# Altium PCB S bus (5.775 X 3.30 inches).PCBDOC
Units mm, origin at the board's own origin, x right, y up, seen from the top; angles counter-clockwise.
Board outline 146.69 x 83.82 mm, 10 copper layers (TopLayer, MidLayer1, MidLayer2, MidLayer3, MidLayer4, MidLayer5, MidLayer6, MidLayer7, MidLayer8, BottomLayer); 5 components, 15 nets, 109 pads, 0 vias.
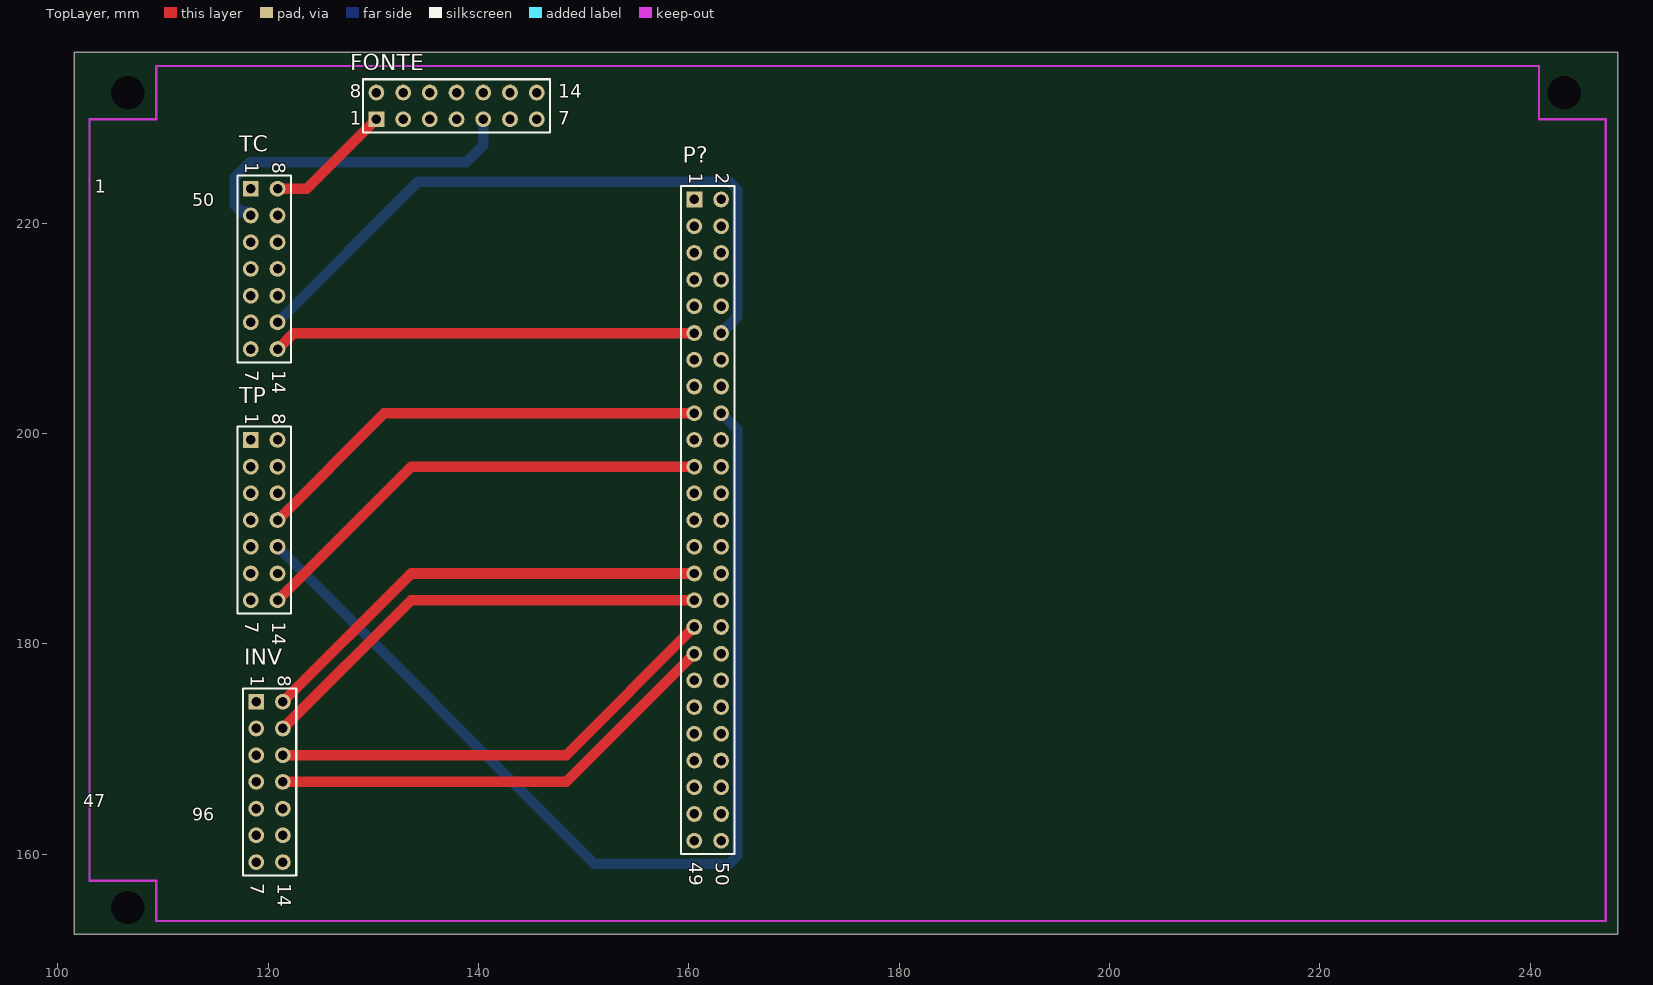
[diagram p0: TopLayer view]
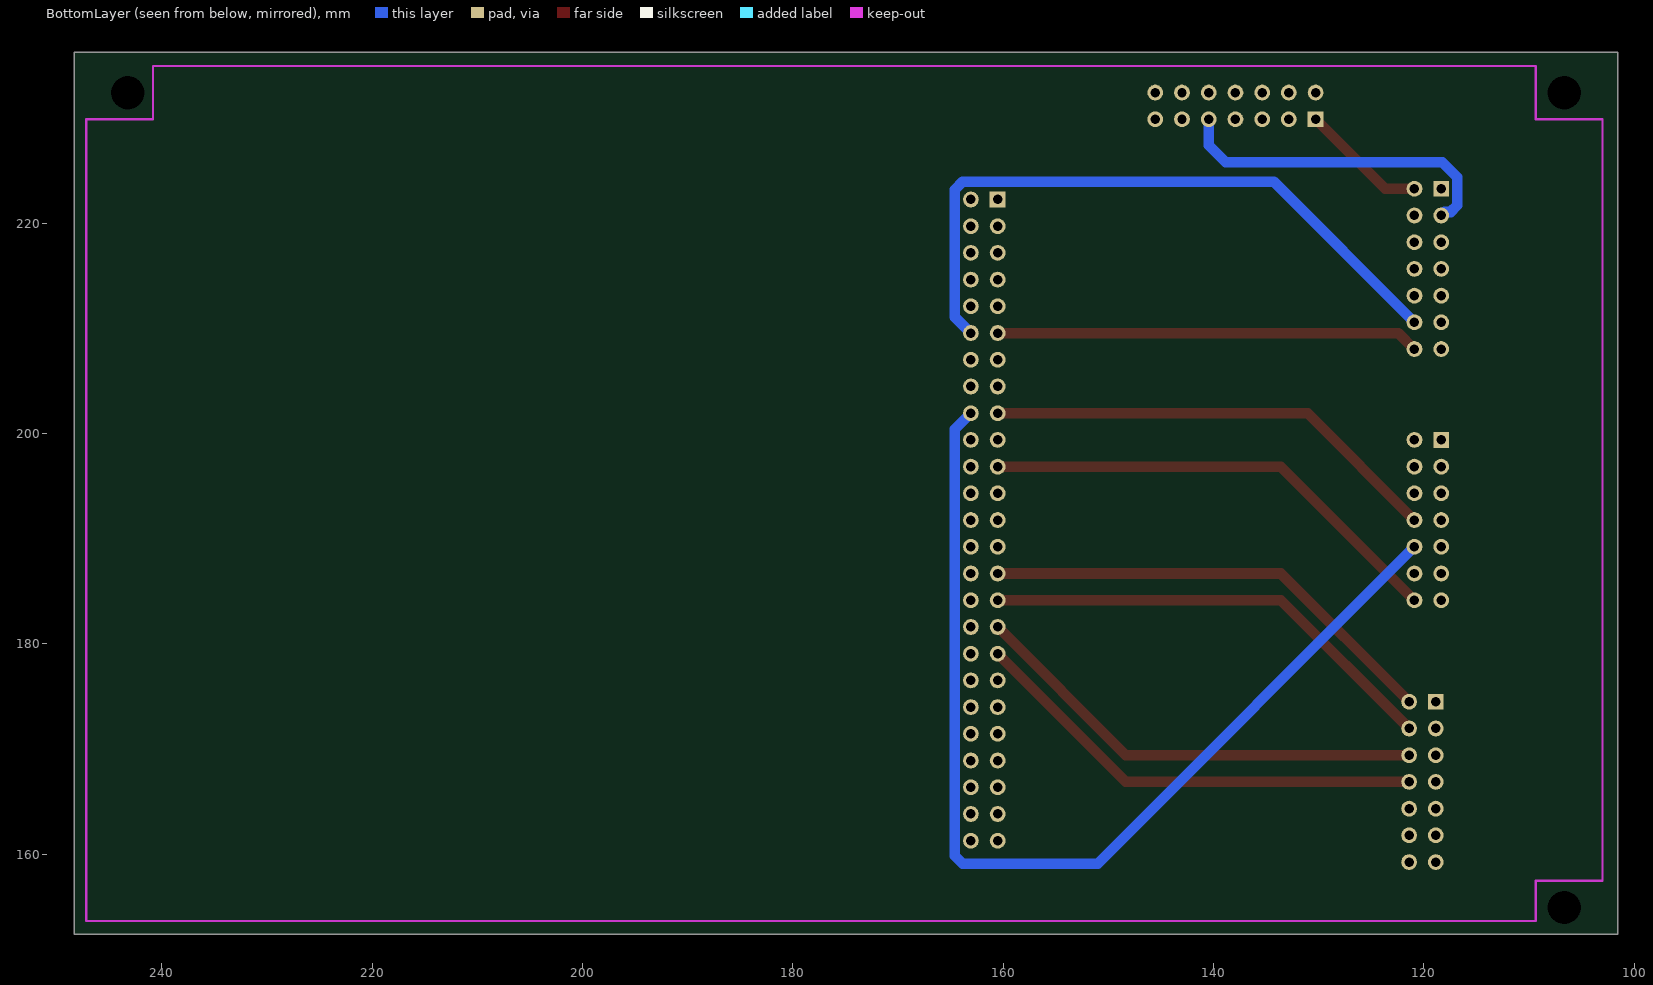
[diagram p1: BottomLayer view, seen from below]
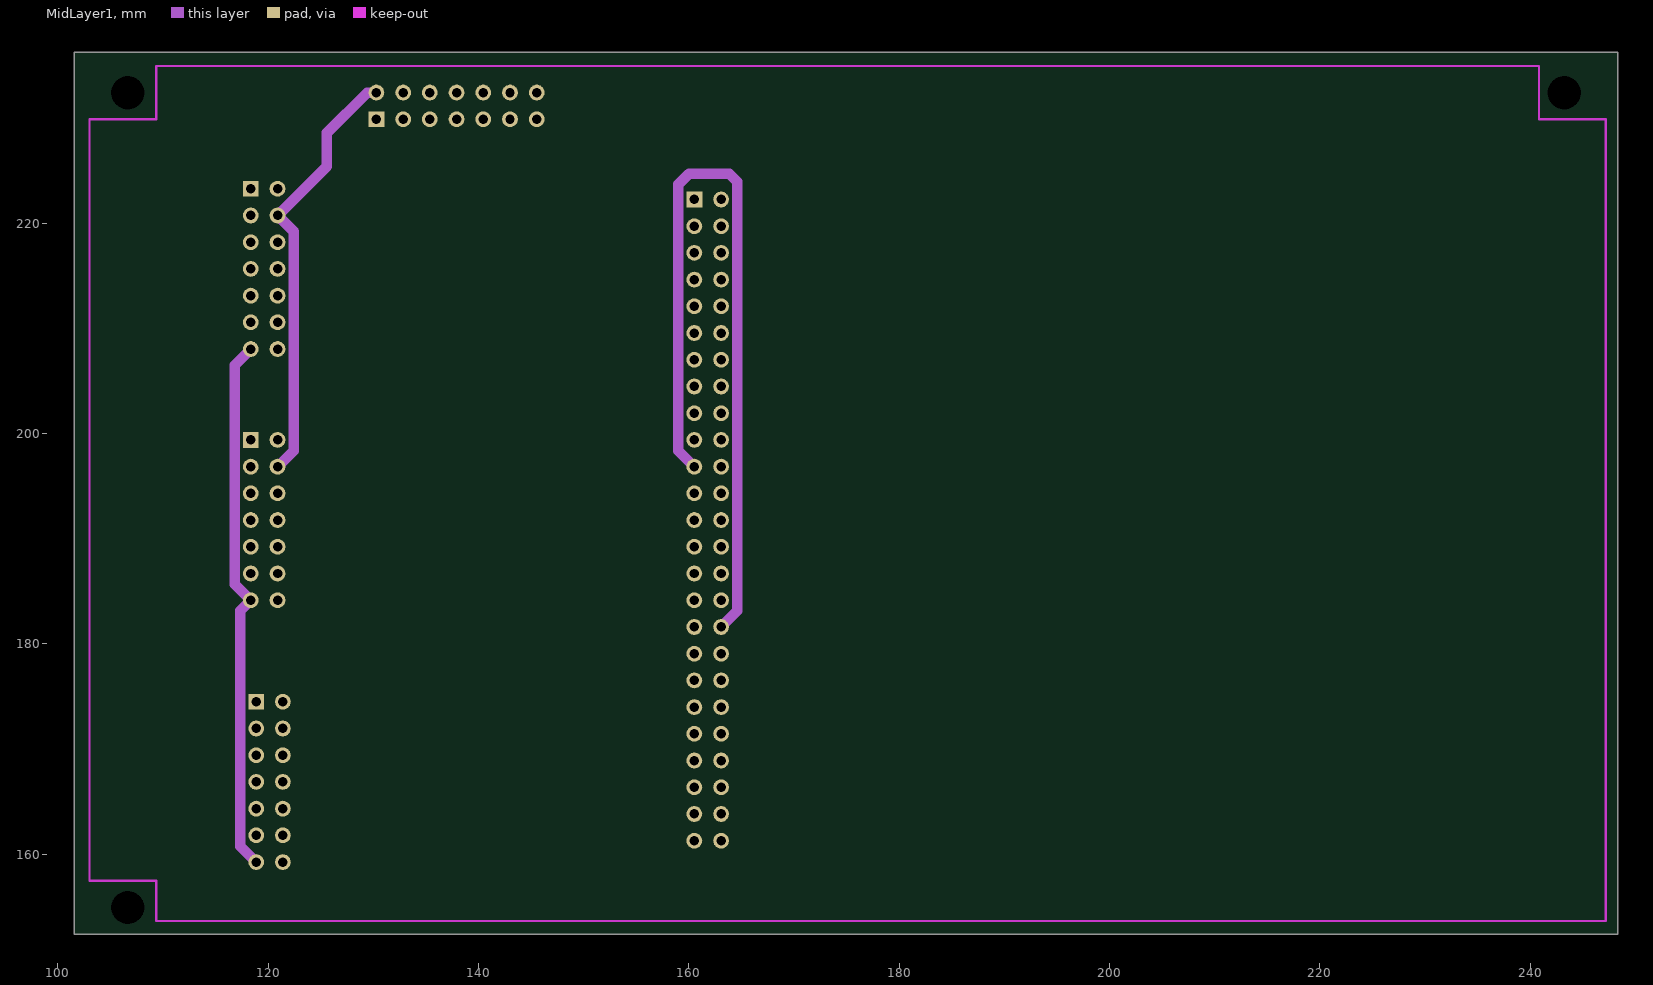
[diagram p2: MidLayer1]
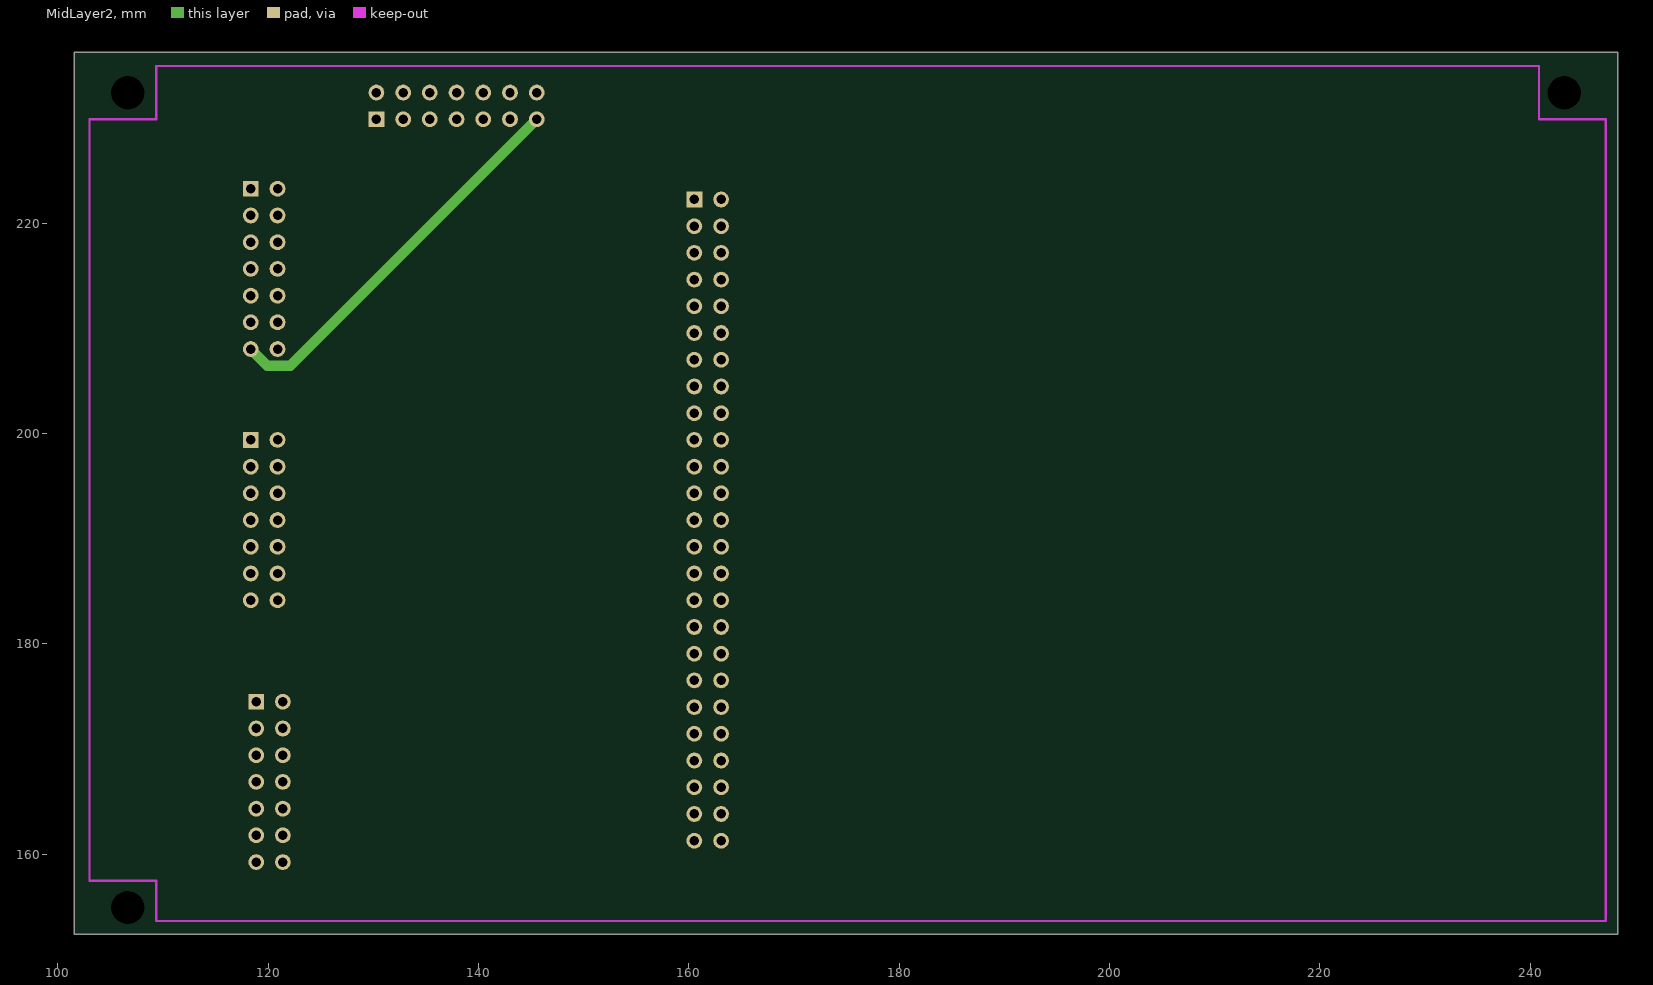
[diagram p3: MidLayer2]
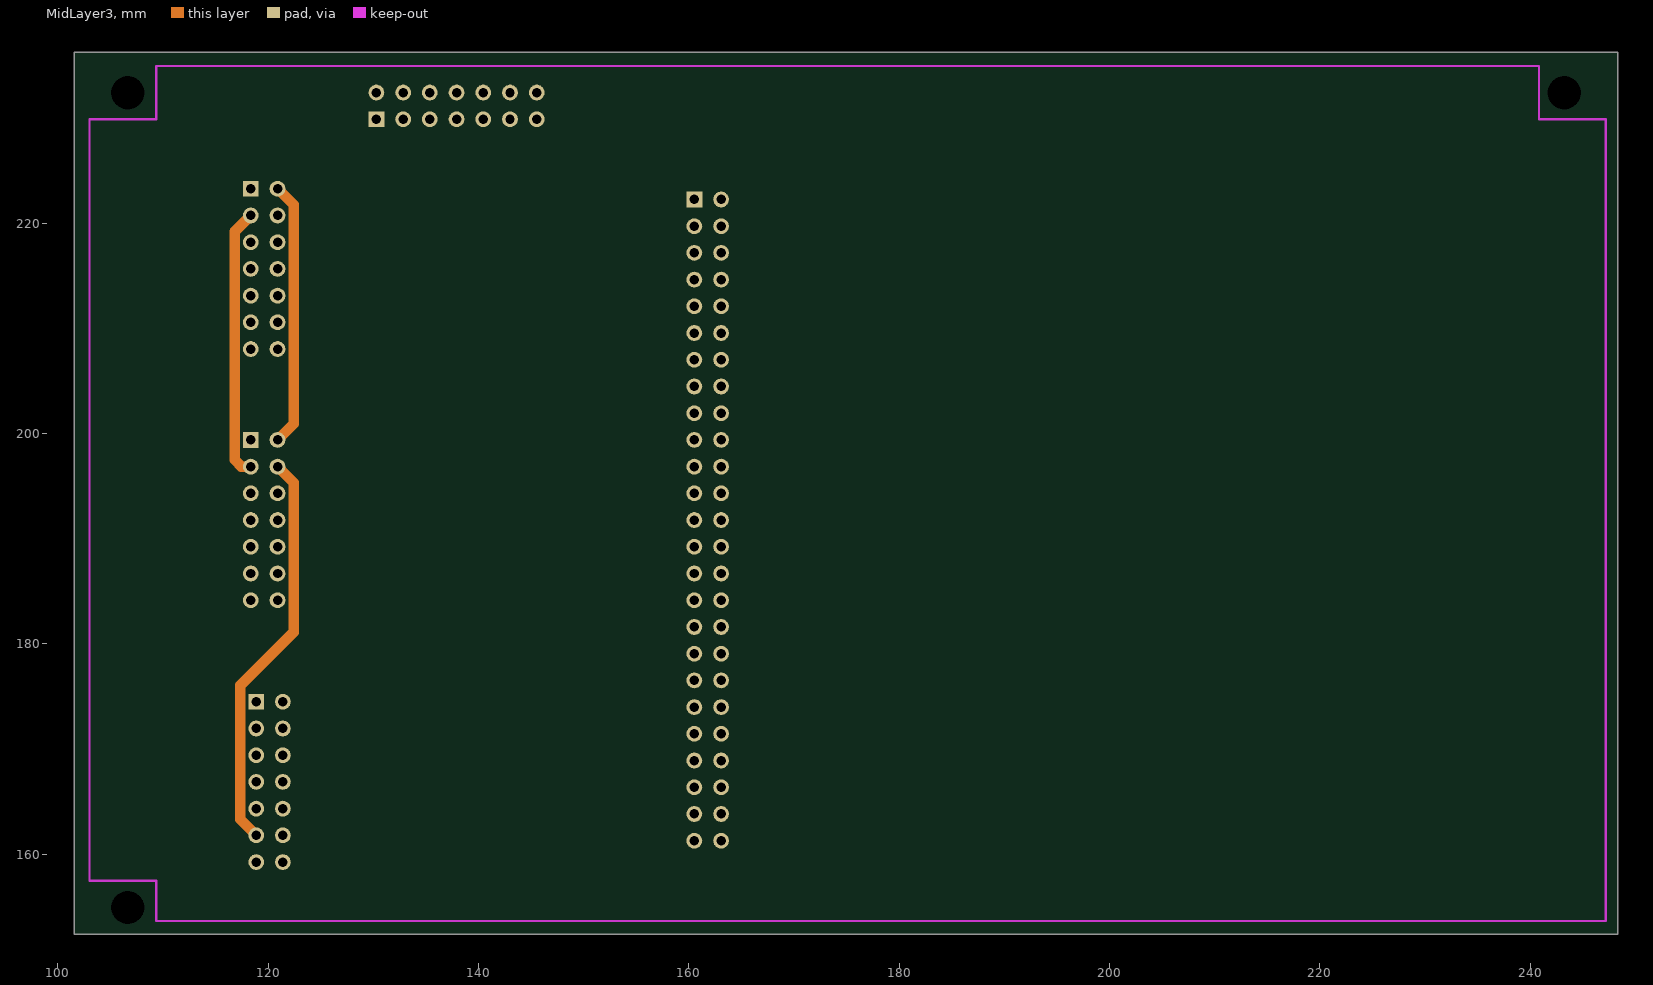
[diagram p4: MidLayer3]
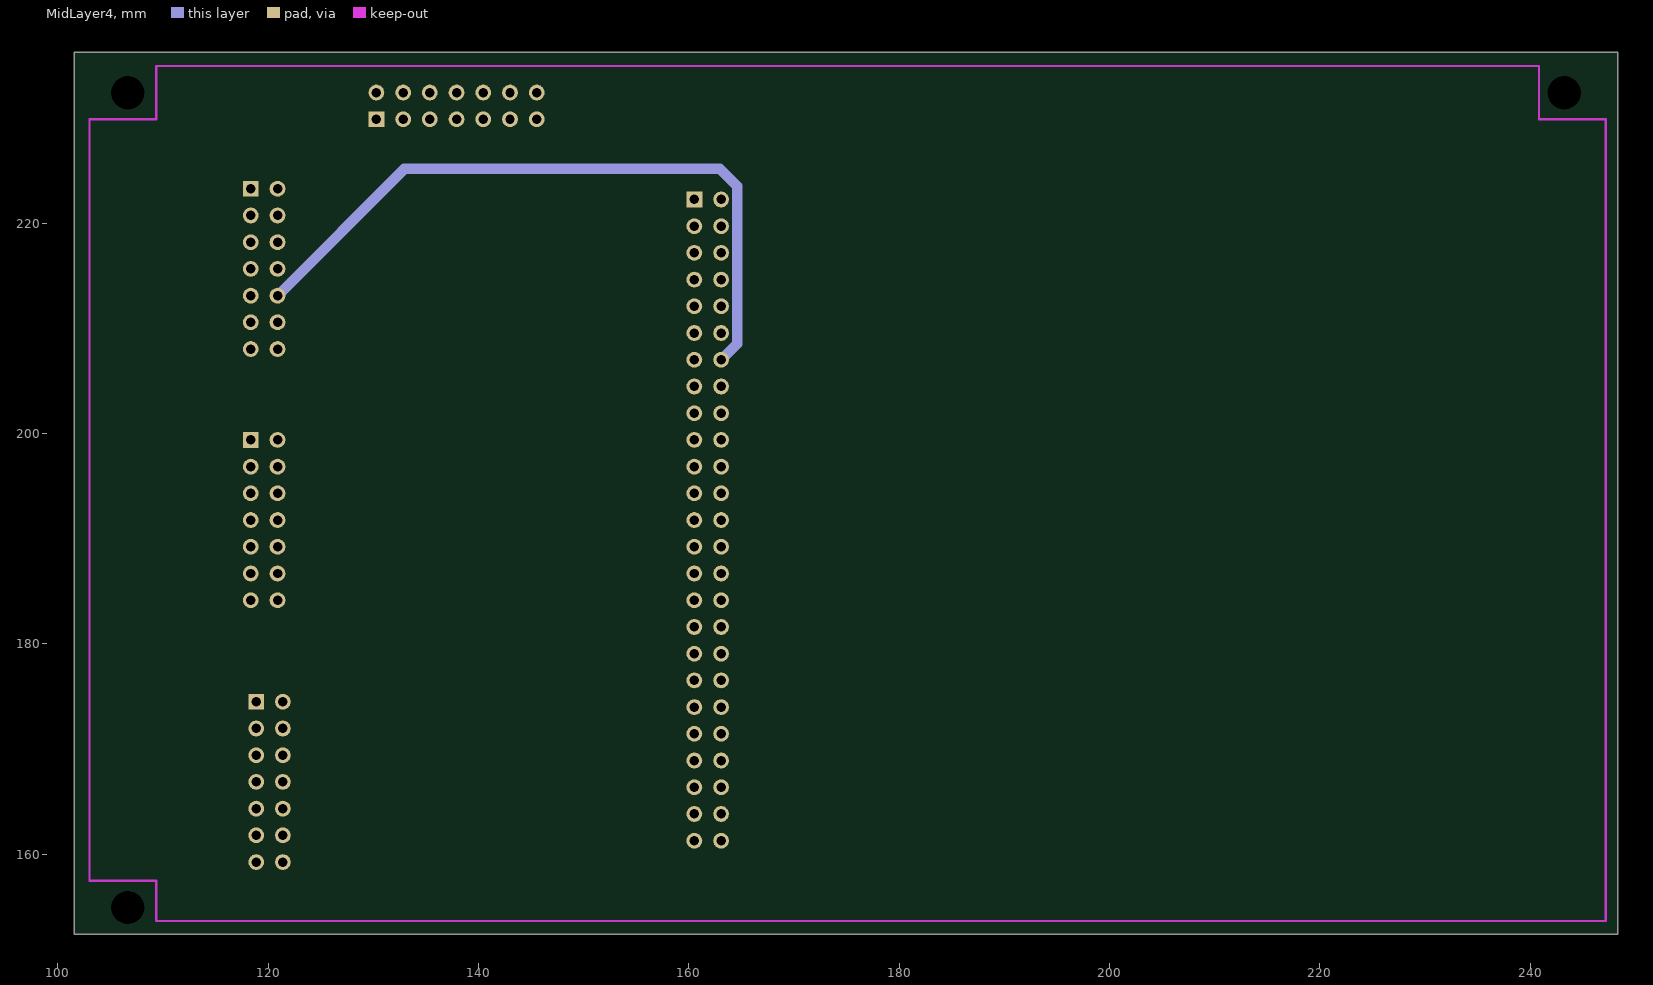
[diagram p5: MidLayer4]
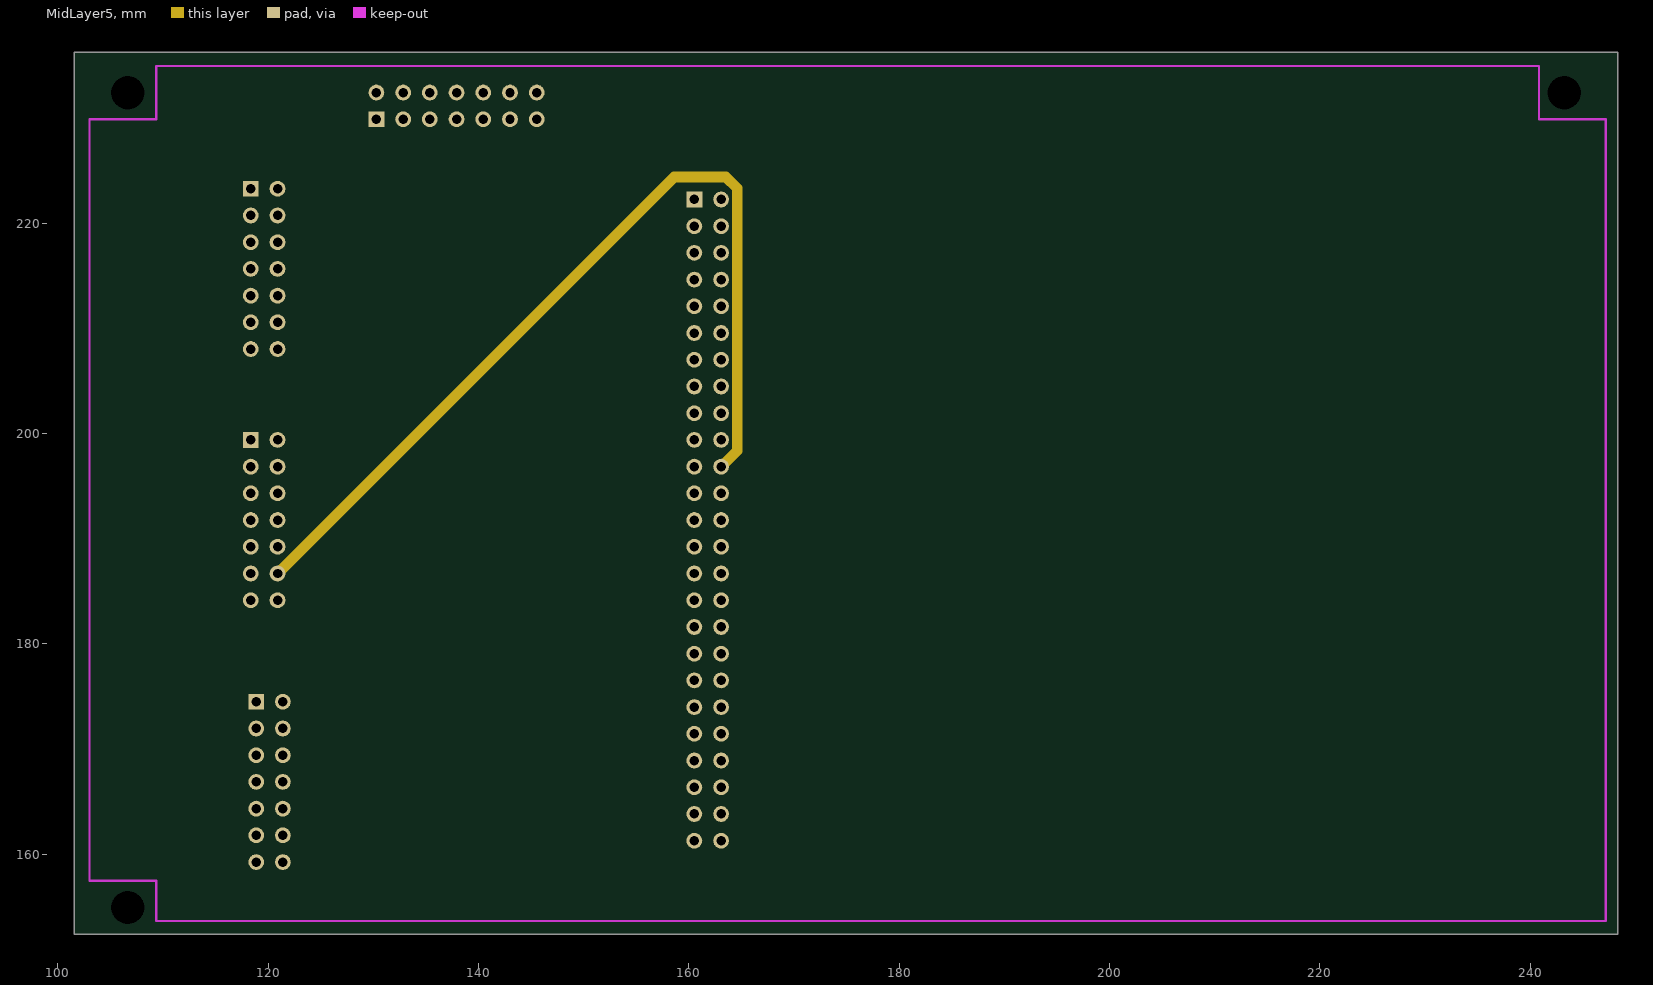
[diagram p6: MidLayer5]
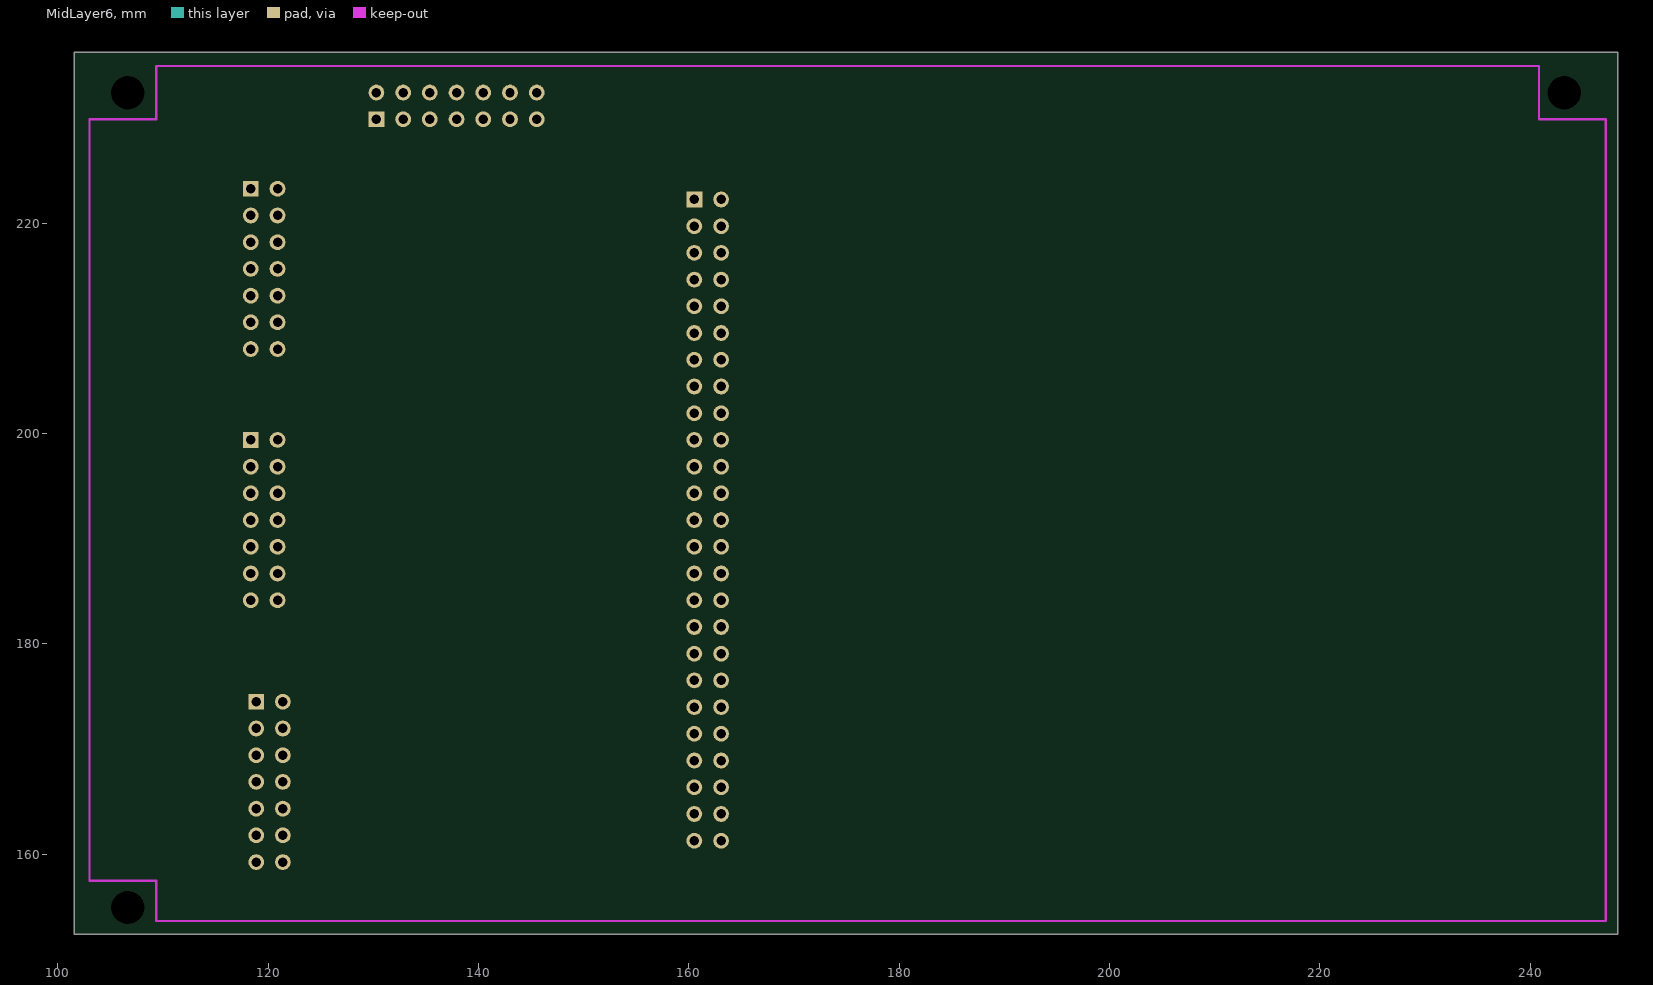
[diagram p7: MidLayer6]
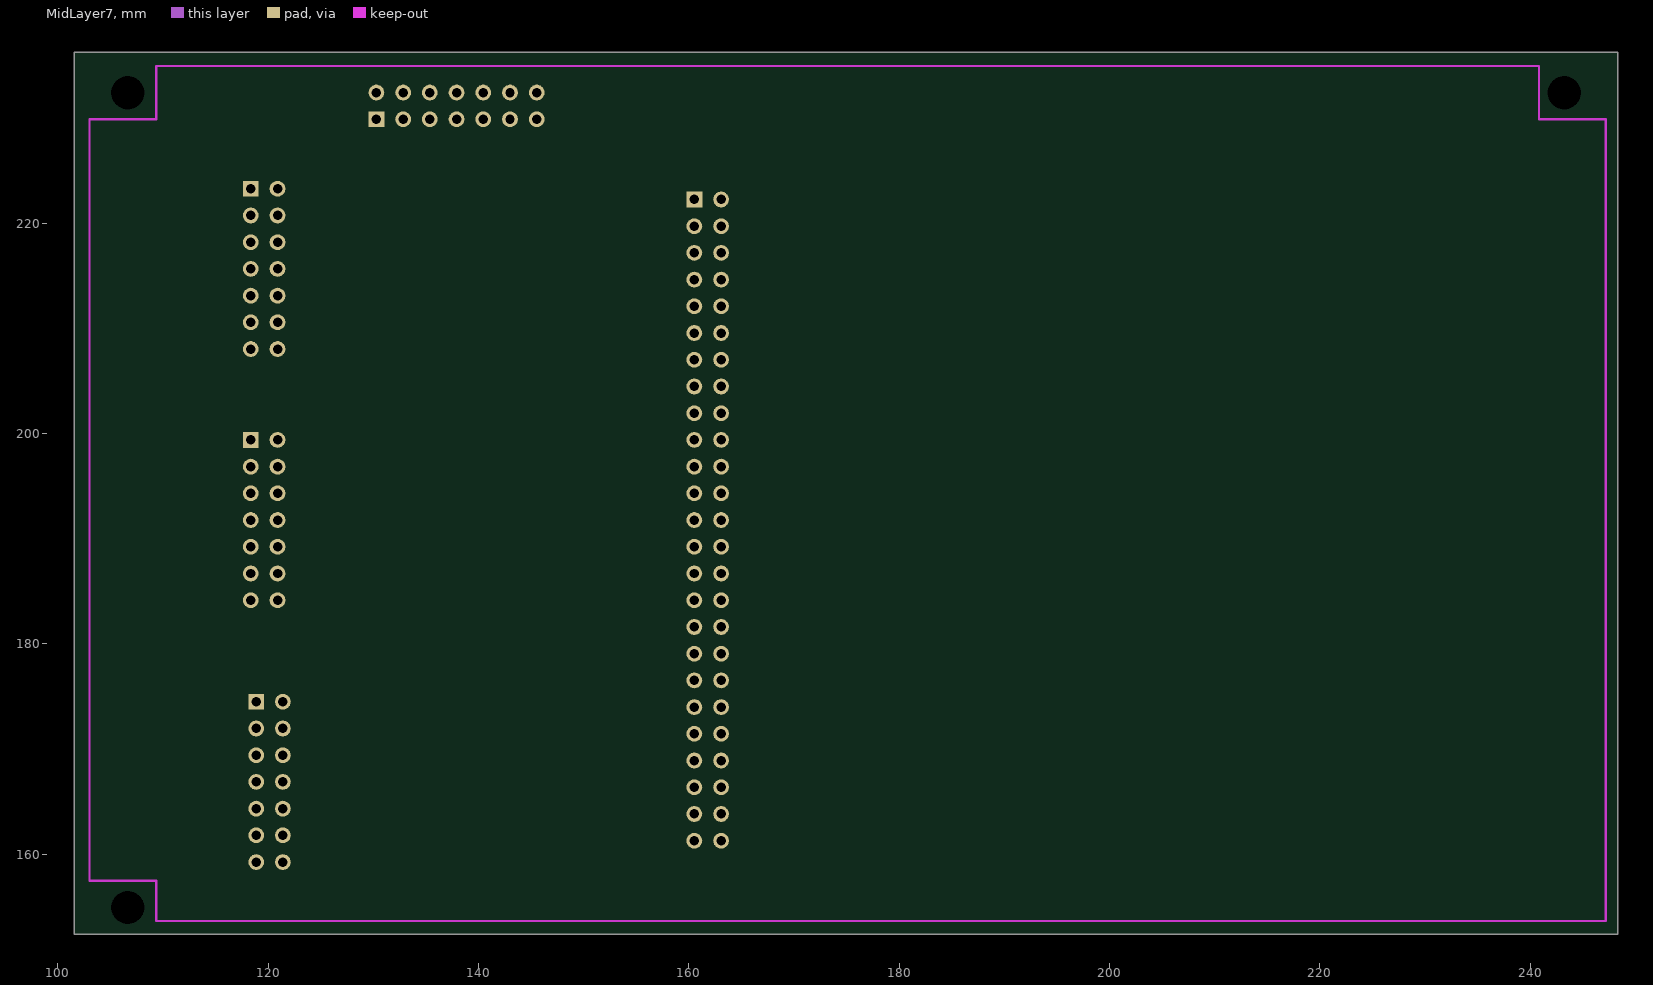
[diagram p8: MidLayer7]
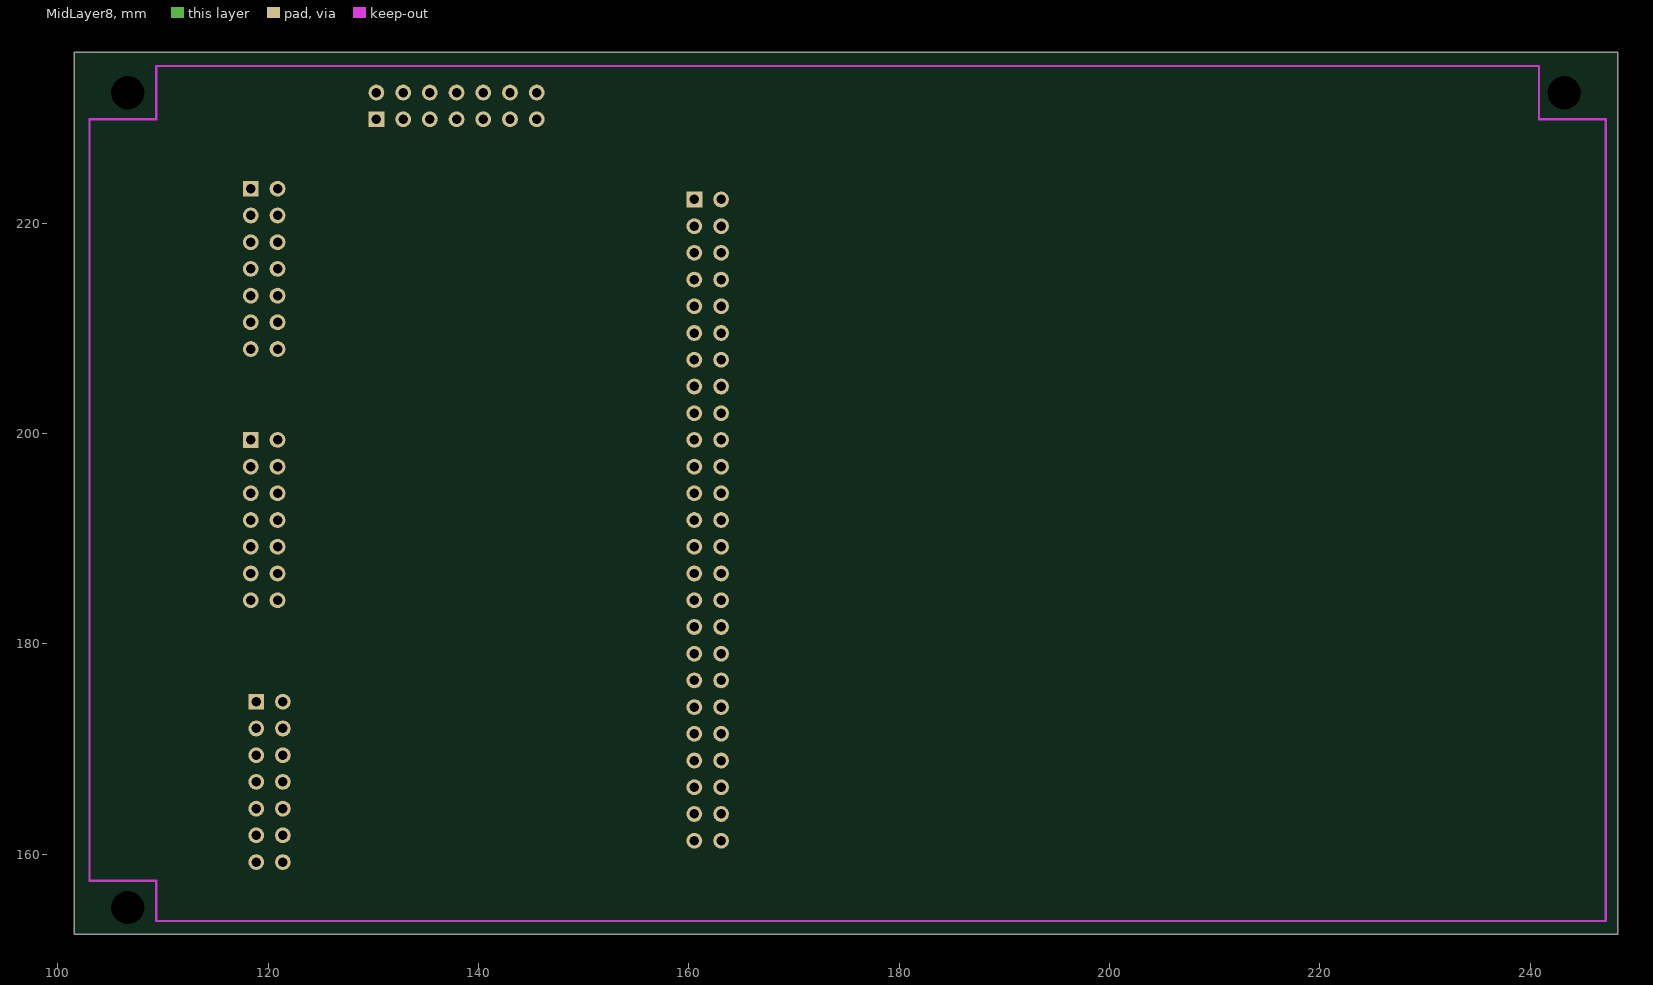
[diagram p9: MidLayer8]

## Layer stack, top to bottom
TopSolder: solder mask 0.0102, Solder Resist, Dk 3.5
TopLayer: signal copper 0.0356
Dielectric1: core 0.32, FR-4, Dk 4.8
MidLayer1: signal copper 0.0356
Dielectric2: prepreg 0.32, FR-4, Dk 4.8
MidLayer2: signal copper 0.0356
Dielectric3: core 0.32, FR-4, Dk 4.8
MidLayer3: signal copper 0.0356
Dielectric4: prepreg 0.32, FR-4, Dk 4.8
MidLayer4: signal copper 0.0356
Dielectric5: core 0.32, FR-4, Dk 4.8
MidLayer5: signal copper 0.0356
Dielectric6: prepreg 0.32, FR-4, Dk 4.8
MidLayer6: signal copper 0.0356
Dielectric7: core 0.32, FR-4, Dk 4.8
MidLayer7: signal copper 0.0356
Dielectric8: prepreg 0.32, FR-4, Dk 4.8
MidLayer8: signal copper 0.0356
Dielectric9: core 0.32, FR-4, Dk 4.8
BottomLayer: signal copper 0.0356
BottomSolder: solder mask 0.0102, Solder Resist, Dk 3.5

## Board outline
101.6,152.4 248.285,152.4 248.285,236.22 101.6,236.22

## Design rules (kind name [scope] priority, off if disabled: settings)
Clearance [All] p1: gap=0.254 ignorepadtopadclearanceinfootprint=FALSE except(0: Arc-Hole Track-Hole SMDPad-Hole THPad-Hole Via-Hole Fill-Hole Poly-Hole Region-Hole Text-Hole)
FabricationTestPointUsage TestPointUsage [All] p1: valid=0 allowmultiple=FALSE
FabricationTestpoint Testpoint [All] p1: side=3 testpointundercomponent=TRUE minsize=1.016 maxsize=2.54 preferedsize=1.524 minholesize=0.508 maxholesize=1.016 preferedholesize=0.813 testpointgrid=0.025 allowsidetop=TRUE allowsidebottom=TRUE usegrid=TRUE gridtolerance=0
PlaneClearance [All] p1: clearance=0.254
PolygonConnect [All] p1: connectstyle=Relief reliefconductorwidth=0.254 reliefentries=4 polygonreliefangle="90 Angle" airgapwidth=0.254
RoomDefinition "S bus (5.775 X 3.30 inches)" [InComponentClass('S bus (5.775 X 3.30 inches)')] p1: confinementstyle=ConfineIn formatcopy=TRUE lockcomponents=FALSE outline 249.428,153.924 277.368,153.924 277.368,179.07 249.428,179.07
RoutingVias [All] p1: holewidth=0.711 width=1.27 viastyle="Through Hole" minholewidth=0.711 minwidth=1.27 maxholewidth=0.711 maxwidth=1.27
SilkToSolderMaskClearance SilkscreenOverComponentPads [IsPad] p1: minsilkscreentomaskgap=0.254 clearancetoexposedcopper=TRUE
SolderMaskExpansion [All] p1: expansion=0.051
Width [All] p1: maxlimit=2 minlimit=0.75 preferedwidth=1
26 further rules are at their usual default settings.

## Components (designator, comment, footprint, x,y, rotation, side; value= is the part's Value field where it differs from the comment)
FONTE "Header 7X2A" HDR2X7_CEN 130.302,229.87 r0 top
INV "Header 7X2A" HDR2X7_CEN 118.872,174.498 r270 top
P? "Header 25X2" HDR2X25 160.528,222.25 r270 top
TC "Header 7X2A" HDR2X7_CEN 118.364,223.266 r270 top
TP "Header 7X2A" HDR2X7_CEN 118.364,199.39 r270 top

## Footprints (in the part's own frame and the unit in brackets; to place one, negate y for a bottom-side part, rotate by r counter-clockwise, add the part's x,y. Pads: shape width x height; smd on the part's side, far side on the other; paste and mask are expansions set on the pad)
HDR2X7_CEN [mm] "Connector; Header; 7x2 Position"
  rect 1.5x1.5 hole 0.9: 1(0,0)
  round 1.5 hole 0.9: 2(2.54,0) 3(5.08,0) 4(7.62,0) 5(10.16,0) 6(12.7,0) 7(15.24,0) 8(0,2.54) 9(2.54,2.54) 10(5.08,2.54) 11(7.62,2.54) 12(10.16,2.54) 13(12.7,2.54) 14(15.24,2.54)
  silkscreen extent -1.27,-1.27 16.51,3.81
HDR2X25 [mm] "Connector; Header; 25x2 Position"
  rect 1.5x1.5 hole 0.9: 1(0,0)
  round 1.5 hole 0.9: 2(0,2.54) 3(2.54,0) 4(2.54,2.54) 5(5.08,0) 6(5.08,2.54) 7(7.62,0) 8(7.62,2.54) 9(10.16,0) 10(10.16,2.54) 11(12.7,0) 12(12.7,2.54) 13(15.24,0) 14(15.24,2.54) 15(17.78,0) 16(17.78,2.54) 17(20.32,0) 18(20.32,2.54) 19(22.86,0) 20(22.86,2.54) 21(25.4,0) 22(25.4,2.54) 23(27.94,0) 24(27.94,2.54) 25(30.48,0) 26(30.48,2.54) 27(33.02,0) 28(33.02,2.54) 29(35.56,0) 30(35.56,2.54) 31(38.1,0) 32(38.1,2.54) 33(40.64,0) 34(40.64,2.54) 35(43.18,0) 36(43.18,2.54) 37(45.72,0) 38(45.72,2.54) 39(48.26,0) 40(48.26,2.54) 41(50.8,0) 42(50.8,2.54) 43(53.34,0) 44(53.34,2.54) 45(55.88,0) 46(55.88,2.54) 47(58.42,0) 48(58.42,2.54) 49(60.96,0) 50(60.96,2.54)
  silkscreen extent -1.27,-1.27 62.23,3.81

## Part data
FONTE INV TC TP: "Header, 7-Pin, Dual row", LatestRevisionDate=17-Jul-2002, LatestRevisionNote="Re-released for DXP Platform.", Publisher="Altium Limited"
P?: "Header, 25-Pin, Dual row", LatestRevisionDate=17-Jul-2002, LatestRevisionNote="Re-released for DXP Platform.", Publisher="Altium Limited"

## Free pads (board coordinates)
  round 1.27 hole 3.175: 1(243.205,232.41) 2(106.68,232.41) 3(106.68,154.94)

## Nets (pads, with @x,y where several pads share a name; then routed paths per layer and width w, separated by ;. In a path a pad name is that pad's centre, name@x,y a point inside that pad or via, vN(x,y) a via of type N, cw(c..) or ccw(c..) an arc to the next point about the centre after c; other vN are vias at no path point)
NetFONTE_1: FONTE.1 TC.8 TP.8 | length 37.3
  TopLayer w1: TC.8 123.698,223.266 FONTE.1
  MidLayer3 w1: TP.8 122.428,200.914 122.428,221.742 TC.8
NetFONTE_5: FONTE.5 TC.2 TP.2 | length 57.6
  MidLayer3 w1: TP.2 117.475,196.85 116.84,197.485 116.84,219.202 TC.2
  BottomLayer w1: TC.2 118.034,221.056 117.475,221.056 116.84,221.691 116.84,224.358 118.262,225.781 138.836,225.781 140.462,227.406 FONTE.5
NetFONTE_7: FONTE.7 INV.7 TC.7 TP.7 | length 88.6
  MidLayer1 w1: TC.7 116.84,206.502 116.84,185.674 TP.7 117.348,183.134 117.348,160.782 INV.7
  MidLayer2 w1: TC.7 119.939,206.451 122.123,206.451 FONTE.7
NetFONTE_8: FONTE.8 INV.6 TC.9 TP.9 | length 79.7
  MidLayer1 w1: TP.9 122.428,198.374 122.428,219.202 TC.9 125.603,225.425 125.603,228.6 129.413,232.41 FONTE.8
  MidLayer3 w1: INV.6 117.348,163.322 117.348,176.047 122.428,181.127 122.428,195.326 TP.9
NetINV_8: INV.8 P?.29 | length 44.2
  TopLayer w1: INV.8 133.604,186.69 P?.29
NetINV_9: INV.9 P?.31 | length 44.2
  TopLayer w1: INV.9 133.604,184.15 P?.31
NetINV_10: INV.10 P?.33 | length 44.2
  TopLayer w1: INV.10 148.336,169.418 P?.33
NetINV_11: INV.11 P?.35 | length 44.2
  TopLayer w1: INV.11 148.336,166.878 P?.35
NetP?_11: P?.11 TC.14 | length 40.3
  TopLayer w1: TC.14 122.428,209.55 P?.11
NetP?_12: P?.12 TC.13 | length 63.8
  BottomLayer w1: TC.13 134.29,223.952 163.83,223.952 164.592,223.19 164.592,211.074 P?.12
NetP?_14: P?.14 TC.12 | length 66.5
  MidLayer4 w1: TC.12 132.969,225.171 162.941,225.171 164.592,223.52 164.592,208.534 P?.14
NetP?_17: P?.17 TP.11 | length 43.8
  TopLayer w1: TP.11 131.064,201.93 P?.17
NetP?_18: P?.18 TP.12 | length 99.2
  BottomLayer w1: TP.12 151.028,159.106 163.83,159.106 164.592,159.868 164.592,200.406 P?.18
NetP?_21: P?.21 P?.34 TP.14 | length 121.6
  TopLayer w1: TP.14 133.604,196.85 P?.21
  MidLayer1 w1: P?.21 159.004,198.374 159.004,223.672 160.02,224.688 163.83,224.688 164.592,223.926 164.592,183.134 P?.34
NetP?_22: P?.22 TP.13 | length 86.8
  MidLayer5 w1: TP.13 158.598,224.384 163.525,224.384 164.592,223.317 164.592,198.374 P?.22
pads on no net: FONTE.2 FONTE.3 FONTE.4 FONTE.6 FONTE.9 FONTE.10 FONTE.11 FONTE.12 FONTE.13 FONTE.14 INV.1 INV.2 INV.3 INV.4 INV.5 INV.12 INV.13 INV.14 P?.1 P?.2 P?.3 P?.4 P?.5 P?.6 P?.7 P?.8 P?.9 P?.10 P?.13 P?.15 P?.16 P?.19 P?.20 P?.23 P?.24 P?.25 P?.26 P?.27 P?.28 P?.30 P?.32 P?.36 P?.37 P?.38 P?.39 P?.40 P?.41 P?.42 P?.43 P?.44 P?.45 P?.46 P?.47 P?.48 P?.49 P?.50 TC.1 TC.3 TC.4 TC.5 TC.6 TC.10 TC.11 TP.1 TP.3 TP.4 TP.5 TP.6 TP.10

## Keep-outs
KeepOutLayer:
  lines w0.203: 103.022,157.48 103.022,229.87 109.372,229.87 109.372,234.95 240.817,234.95 240.817,229.87 247.167,229.87 247.167,153.67 109.372,153.67 109.372,157.48 103.022,157.48

## Other copper
TopLayer:
  text ".GTL" at 240.69,241.046 h2.29
MidLayer1:
  text ".G1" at 240.69,241.046 h2.29
MidLayer2:
  text ".G2" at 240.69,241.046 h2.29
MidLayer3:
  text ".G3" at 240.69,241.046 h2.29
MidLayer4:
  text ".G4" at 240.69,241.046 h2.29
MidLayer5:
  text ".G5" at 240.69,241.046 h2.29
MidLayer6:
  text ".G6" at 240.69,241.046 h2.29
MidLayer7:
  text ".G7" at 240.69,241.046 h2.29
MidLayer8:
  text ".G8" at 240.69,241.046 h2.29
BottomLayer:
  text "P/N XXXXXX-XXX REV A" at 135.128,241.3 h1.91
  text ".GBL" at 240.69,241.046 h2.29

## Silkscreen, mask and mechanical layers (free items; w line width, h text height)
TopOverlay:
  rectangle: 108.737,246.456 127.787,251.536
  rectangle: 108.737,253.822 127.787,258.902
  lines w0.254: 136.972,256.438 ccw(c138.201,257.442) 136.975,256.434
  text "C" at 139.598,256.489 h1.52
  text "2002 COMPANY NAME" at 143.408,256.489 h1.91
  text "S/N" at 102.387,255.283 h1.91
  text "BOARD NAME" at 139.598,252.044 h1.91
  text "ASSY NO.: XXXXXX" at 139.598,248.234 h1.91
  text "REV" at 102.387,247.726 h1.91
  text ".GTO" at 240.69,241.046 h2.29
  text "1" at 103.505,222.885 h1.22
  text "50" at 112.818,221.615 h1.22
  text "47" at 102.447,164.465 h1.22
  text "96" at 112.818,163.195 h1.22
TopPaste:
  text ".GTP" at 240.69,241.046 h2.29
BottomPaste:
  text ".GBP" at 240.69,241.046 h2.29
TopSolder:
  text ".GTS" at 240.69,241.046 h2.29
BottomSolder:
  text ".GBS" at 240.69,241.046 h2.29
Mechanical1:
  the board outline again, w0.508
Mechanical4:
  text ".Pcb_File_Name_No_Path" at 192.43,245.872 h2.29
  text ".Printout_Name" at 192.43,241.046 h2.29
DrillDrawing:
  text ".LEGEND" at 254.254,177.546 h2.29
  text "Drilling Details." at 254.254,172.466 h2.29

## Dimensions
101.092,154.94 to 101.6,152.4 on Mechanical4
106.68,151.892 to 101.6,152.4 on Mechanical4

## Text inside footprints (layer, text, board x,y; h text height)
FONTE: TopOverlay "8" at 127.762,231.902 h1.27; TopOverlay "1" at 127.762,229.362 h1.27; TopOverlay "7" at 147.574,229.362 h1.27; TopOverlay "14" at 147.574,231.902 h1.27
INV: TopOverlay "8" at 120.904,177.038 h1.27 r270; TopOverlay "1" at 118.364,177.038 h1.27 r270; TopOverlay "7" at 118.364,157.226 h1.27 r270; TopOverlay "14" at 120.904,157.226 h1.27 r270
P?: TopOverlay "2" at 162.56,224.79 h1.27 r270; TopOverlay "1" at 160.02,224.79 h1.27 r270; TopOverlay "49" at 160.02,159.258 h1.27 r270; TopOverlay "50" at 162.56,159.258 h1.27 r270
TC: TopOverlay "8" at 120.396,225.806 h1.27 r270; TopOverlay "1" at 117.856,225.806 h1.27 r270; TopOverlay "7" at 117.856,205.994 h1.27 r270; TopOverlay "14" at 120.396,205.994 h1.27 r270
TP: TopOverlay "8" at 120.396,201.93 h1.27 r270; TopOverlay "1" at 117.856,201.93 h1.27 r270; TopOverlay "7" at 117.856,182.118 h1.27 r270; TopOverlay "14" at 120.396,182.118 h1.27 r270